# Altium PCB Layout_v2.PcbDoc
Units mm, origin at the board's own origin, x right, y up, seen from the top; angles counter-clockwise.
Board outline 76.83 x 79.5 mm, 2 copper layers (Top Layer, Bottom Layer); 5 components, 24 nets, 100 pads, 0 vias.
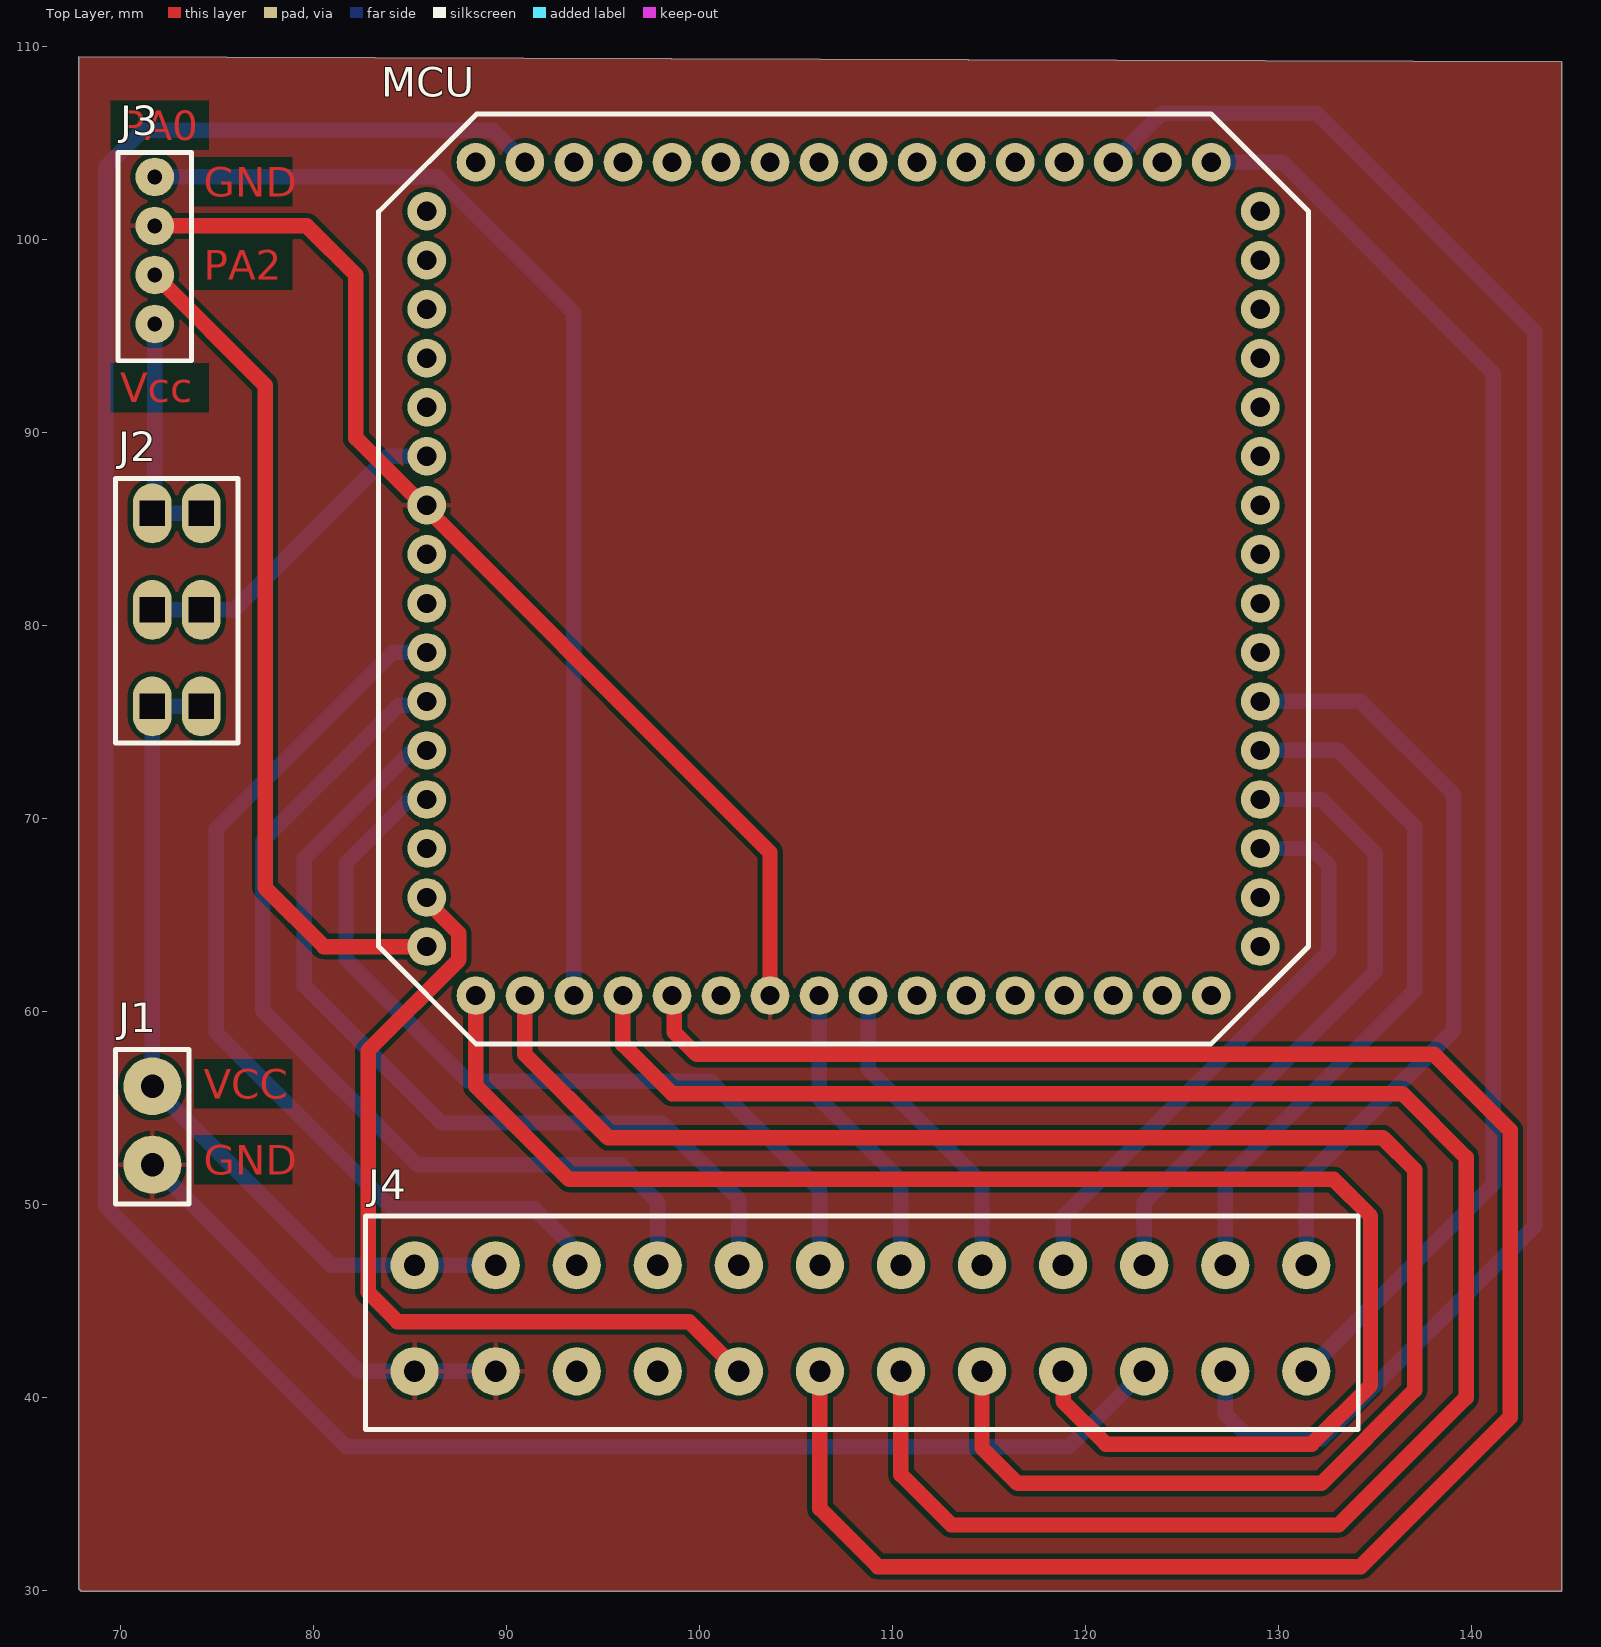
[diagram p0: Top Layer view]
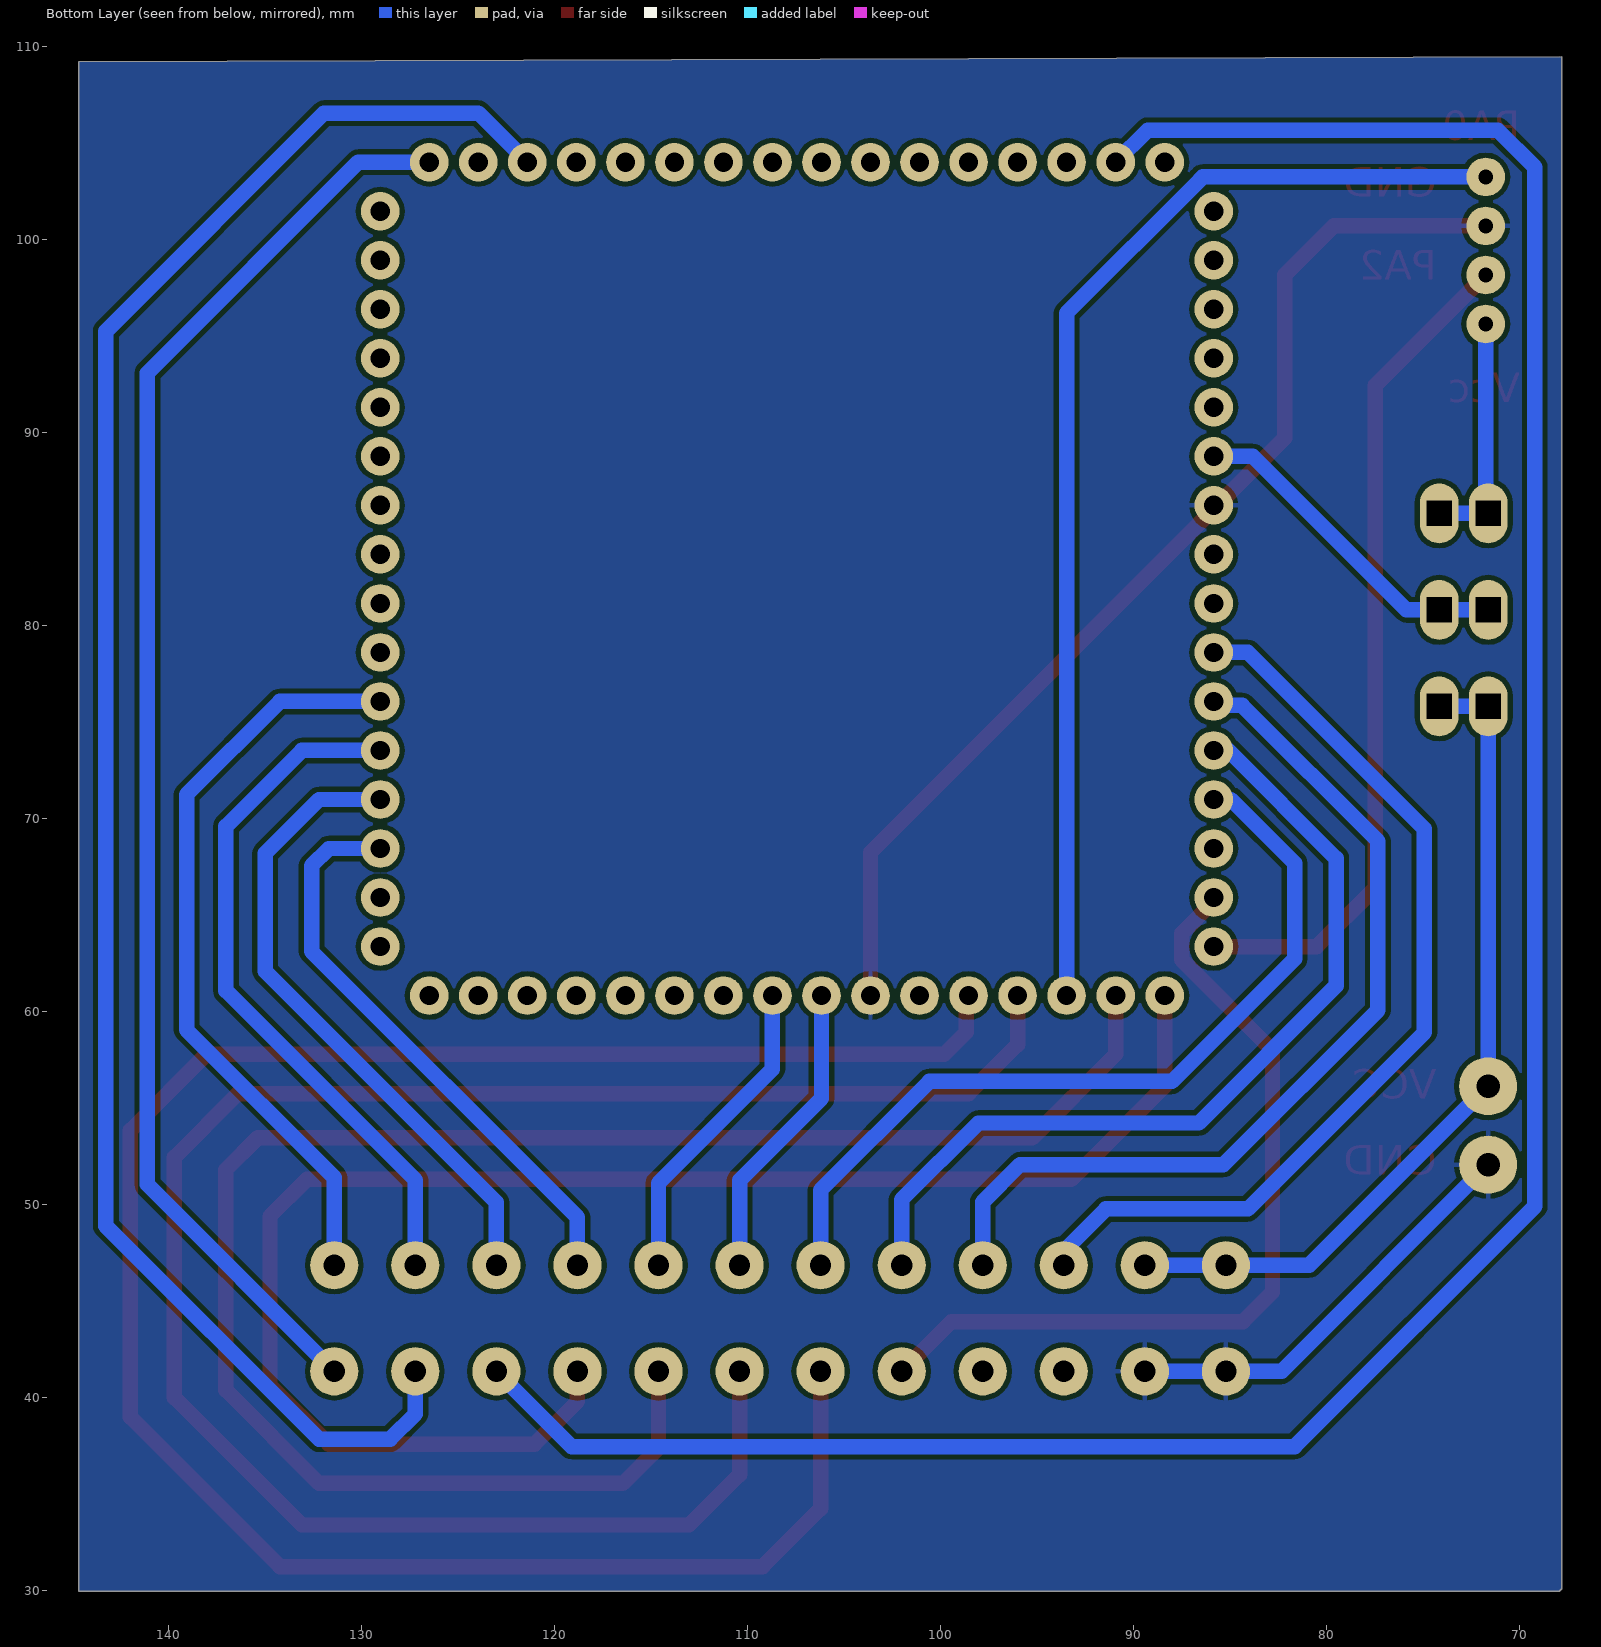
[diagram p1: Bottom Layer view, seen from below]

## Layer stack, top to bottom
Top Layer: signal copper 0.0356
Dielectric: dielectric 0.32, FR-4, Dk 4.8
Bottom Layer: signal copper 0.0356

## Board outline
67.818,109.474 67.818,30.099 67.945,29.972 144.653,29.972 144.653,109.22

## Design rules (kind name [scope] priority, off if disabled: settings)
Clearance [All] p1: gap=0.254
PolygonConnect [All] p1: connectstyle=Relief reliefconductorwidth=0.254 reliefentries=4 polygonreliefangle="90 Angle"
RoutingVias [All] p1: holewidth=0.711 width=1.27 viastyle="Through Hole" minholewidth=0.711 minwidth=1.27 maxholewidth=0.711 maxwidth=1.27
SilkscreenOverComponentPads [All] p1: minsilkscreentomaskgap=0.254
SolderMaskExpansion [All] p1: expansion=0.102
Width [All] p1: maxlimit=0.8 minlimit=0.8 preferedwidth=0.8
27 further rules are at their usual default settings.

## Components (designator, comment, footprint, x,y, rotation, side; value= is the part's Value field where it differs from the comment)
J1 "Power" Power_2P 71.628,56.134 r0 top
J2 "Switch" Switch_3P 74.168,75.819 r180 top
J3 "ICP" ICP_4P 71.755,95.631 r180 top
J4 "IN_Port" IC_Port_24P 85.217,46.863 r90 top
MCU "HT66F2390" HT66F2390_64P 85.852,101.473 r0 top

## Footprints (in the part's own frame and the unit in brackets; to place one, negate y for a bottom-side part, rotate by r counter-clockwise, add the part's x,y. Pads: shape width x height; smd on the part's side, far side on the other; paste and mask are expansions set on the pad)
HT66F2390_64P [mm]
  round 2 hole 1: 1(0,0) 2(0,-2.54) 3(0,-5.08) 4(0,-7.62) 5(0,-10.16) 6(0,-12.7) 7(0,-15.24) 8(0,-17.78) 9(0,-20.32) 10(0,-22.86) 11(0,-25.4) 12(0,-27.94) 13(0,-30.48) 14(0,-33.02) 15(0,-35.56) 16(0,-38.1) 17(2.54,-40.64) 18(5.08,-40.64) 19(7.62,-40.64) 20(10.16,-40.64) 21(12.7,-40.64) 22(15.24,-40.64) 23(17.78,-40.64) 24(20.32,-40.64) 25(22.86,-40.64) 26(25.4,-40.64) 27(27.94,-40.64) 28(30.48,-40.64) 29(33.02,-40.64) 30(35.56,-40.64) 31(38.1,-40.64) 32(40.64,-40.64) 33(43.18,-38.1) 34(43.18,-35.56) 35(43.18,-33.02) 36(43.18,-30.48) 37(43.18,-27.94) 38(43.18,-25.4) 39(43.18,-22.86) 40(43.18,-20.32) 41(43.18,-17.78) 42(43.18,-15.24) 43(43.18,-12.7) 44(43.18,-10.16) 45(43.18,-7.62) 46(43.18,-5.08) 47(43.18,-2.54) 48(43.18,0) 49(40.64,2.54) 50(38.1,2.54) 51(35.56,2.54) 52(33.02,2.54) 53(30.48,2.54) 54(27.94,2.54) 55(25.4,2.54) 56(22.86,2.54) 57(20.32,2.54) 58(17.78,2.54) 59(15.24,2.54) 60(12.7,2.54) 61(10.16,2.54) 62(7.62,2.54) 63(5.08,2.54) 64(2.54,2.54)
  silkscreen extent -2.5,-43.14 45.68,5.04
IC_Port_24P [mm]
  round 2.5 hole 1.1: 0(0,0) 1(0,-4.2) 2(0,-8.4) 3(0,-12.6) 4(0,-16.8) 5(0,-21) 6(0,-25.2) 7(0,-29.4) 8(0,-33.6) 9(0,-37.8) 10(0,-42) 11(0,-46.2) 12(-5.5,-46.2) 13(-5.5,-42) 14(-5.5,-37.8) 15(-5.5,-33.6) 16(-5.5,-29.4) 17(-5.5,-25.2) 18(-5.5,-21) 19(-5.5,-16.8) 20(-5.5,-12.6) 21(-5.5,-8.4) 22(-5.5,-4.2) 23(-5.5,0)
  silkscreen extent -8.51,-48.89 2.54,2.54
ICP_4P [mm]
  round 2 hole 0.762: 1(0,0) 2(0,-2.54) 3(0,-5.08) 4(0,-7.62)
  silkscreen extent -1.91,-8.89 1.91,1.91
Power_2P [mm]
  round 3 hole 1.2: 1(0,0) 2(0,-4.064)
  silkscreen extent -1.91,-6.1 1.91,1.91
Switch_3P [mm]
  oval 2x3.1 hole 1.3 square: 1(0,0) 1(2.54,0) 2(0,-5) 2(2.54,-5) 3(0,-10) 3(2.54,-10)
  silkscreen extent -1.91,-11.81 4.45,1.91

## Nets (pads, with @x,y where several pads share a name; then routed paths per layer and width w, separated by ;. In a path a pad name is that pad's centre, name@x,y a point inside that pad or via, vN(x,y) a via of type N, cw(c..) or ccw(c..) an arc to the next point about the centre after c; other vN are vias at no path point)
GND: J1.2 J3.3 J4.22 J4.23 MCU.7 MCU.23 | length 79.9
  Top Layer w0.8: J3.3 79.629,100.711 82.169,98.171 82.169,89.715 103.632,68.252 MCU.23
  Bottom Layer w0.8: J1.2 82.335,41.363 J4.23 J4.22
PA0: J3.4 MCU.19 | length 59.8
  Bottom Layer w0.8: J3.4 86.413,103.251 ; 86.537,103.127 93.472,96.192 MCU.19
PA1: J4.19 MCU.15 | length 44
  Top Layer w0.8: MCU.15 85.852,65.712 87.506,64.058 87.506,62.688 82.804,57.986 82.804,45.466 84.328,43.942 99.438,43.942 J4.19
PA2: J3.2 MCU.16 | length 43.8
  Top Layer w0.8: J3.2 77.47,92.456 77.47,66.421 80.518,63.373 MCU.16
PA3: J4.15 MCU.17 | length 82.3
  Top Layer w0.8: MCU.17 88.392,56.134 93.218,51.308 132.842,51.308 134.747,49.403 134.747,40.64 131.699,37.592 121.031,37.592 118.817,39.806 J4.15
PA4: J4.16 MCU.18 | length 92.2
  Top Layer w0.8: MCU.18 90.932,57.785 95.25,53.467 135.382,53.467 137.033,51.816 137.033,40.386 132.207,35.56 116.459,35.56 114.617,37.402 J4.16
PA6: J4.17 MCU.20 | length 99.5
  Top Layer w0.8: MCU.20 96.012,58.293 98.552,55.753 136.398,55.753 139.7,52.451 139.7,40.005 133.096,33.401 113.03,33.401 110.417,36.014 J4.17
PA7: J4.18 MCU.21 | length 109.6
  Top Layer w0.8: MCU.21 98.679,60.706 98.679,58.928 99.822,57.785 138.049,57.785 141.986,53.848 141.986,38.989 134.239,31.242 109.22,31.242 106.217,34.245 J4.18
PC6: J4.12 MCU.49 | length 74.9
  Bottom Layer w0.8: MCU.49 130.175,104.013 141.097,93.091 141.097,51.043 J4.12
PD0: J4.13 MCU.51 | length 97.3
  Bottom Layer w0.8: MCU.51 123.952,106.553 131.953,106.553 143.256,95.25 143.256,48.895 132.207,37.846 128.524,37.846 127.217,39.153 J4.13
PF7: J4.14 MCU.63 | length 137.6
  Bottom Layer w0.8: MCU.63 89.278,105.667 71.123,105.667 69.215,103.759 69.215,49.911 81.661,37.465 119.119,37.465 J4.14
PG0: J4.11 MCU.38 | length 39.6
  Bottom Layer w0.8: MCU.38 134.239,76.073 139.065,71.247 139.065,59.055 131.417,51.407 J4.11
PG1: J4.10 MCU.37 | length 36.4
  Bottom Layer w0.8: J4.10 127.217,51.271 137.033,61.087 137.033,69.596 133.096,73.533 MCU.37
PG2: J4.9 MCU.36 | length 33.4
  Bottom Layer w0.8: J4.9 123.017,50.119 135.001,62.103 135.001,68.199 132.207,70.993 MCU.36
PG3: J4.8 MCU.35 | length 30.3
  Bottom Layer w0.8: J4.8 118.817,49.348 132.588,63.119 132.588,67.564 131.699,68.453 MCU.35
PG4: J4.2 MCU.10 | length 49.4
  Bottom Layer w0.8: MCU.10 84.074,78.613 74.93,69.469 74.93,58.928 84.074,49.784 91.44,49.784 93.617,47.607 J4.2
PG5: J4.3 MCU.11 | length 48.1
  Bottom Layer w0.8: MCU.11@85.852,75.872 84.381,75.872 77.343,68.834 77.343,60.071 85.344,52.07 95.885,52.07 97.817,50.138 J4.3
PG6: J4.4 MCU.12 | length 45.8
  Bottom Layer w0.8: MCU.12 85.09,73.533 79.502,67.945 79.502,61.341 86.614,54.229 98.044,54.229 102.017,50.256 J4.4
PG7: J4.5 MCU.13 | length 43.9
  Bottom Layer w0.8: MCU.13 84.963,70.993 81.661,67.691 81.661,62.738 88.011,56.388 100.584,56.388 106.217,50.755 J4.5
PH0: J4.6 MCU.24 | length 15.7
  Bottom Layer w0.8: MCU.24 106.172,55.499 110.417,51.254 J4.6
PH1: J4.7 MCU.25 | length 16.4
  Bottom Layer w0.8: MCU.25 108.712,57.023 114.617,51.118 J4.7
VCC: J1.1 J2.1 J4.0 J4.1 | length 43.9
  Bottom Layer w0.8: J2.1@74.168,75.819 71.628,75.819 J1.1 80.899,46.863 J4.0 J4.1
VCC_2: J2.3 J3.1 | length 12.4
  Bottom Layer w0.8: J2.3@71.628,85.819 J2.3@71.882,85.819 ; J3.1 71.755,85.946 J2.3@71.882,85.819 ; J2.3@74.168,85.819 J2.3@71.882,85.819
VDD: J2.2 MCU.6 | length 17.5
  Bottom Layer w0.8: J2.2@71.628,80.819 74.168,80.819 75.866,80.819 83.82,88.773 MCU.6
pads on no net: J4.20 J4.21 MCU.1 MCU.2 MCU.3 MCU.4 MCU.5 MCU.8 MCU.9 MCU.14 MCU.22 MCU.26 MCU.27 MCU.28 MCU.29 MCU.30 MCU.31 MCU.32 MCU.33 MCU.34 MCU.39 MCU.40 MCU.41 MCU.42 MCU.43 MCU.44 MCU.45 MCU.46 MCU.47 MCU.48 MCU.50 MCU.52 MCU.53 MCU.54 MCU.55 MCU.56 MCU.57 MCU.58 MCU.59 MCU.60 MCU.61 MCU.62 MCU.64

## Polygon pours and split planes (outlines as drawn)
GND on Top Layer "Top Layer-No Net" (solid, pour order 36): 67.818,109.474 67.818,30.099 67.945,29.972 144.653,29.972 144.653,109.22
GND on Bottom Layer "Top Layer-No Net1" (solid, pour order 38): 67.818,109.474 67.818,30.099 67.945,29.972 144.653,29.972 144.653,109.22

## Other copper
Top Layer:
  text "PA0" at 69.977,105.156 h1.52
  text "GND" at 74.295,102.235 h1.52
  text "PA2" at 74.295,97.917 h1.52
  text "Vcc" at 69.977,91.567 h1.52
  text "VCC" at 74.295,55.499 h1.52
  text "GND" at 74.295,51.562 h1.52